# Altium PCB Testboard V3.PcbDoc
Units mil, origin at the board's own origin, x right, y up, seen from the top; angles counter-clockwise.
Board outline 6000 x 4000 mil, 2 copper layers (Top Layer, Bottom Layer); 5 components, 44 nets, 132 pads, 0 vias.
Unrouted connection lines stored in the file: 61.
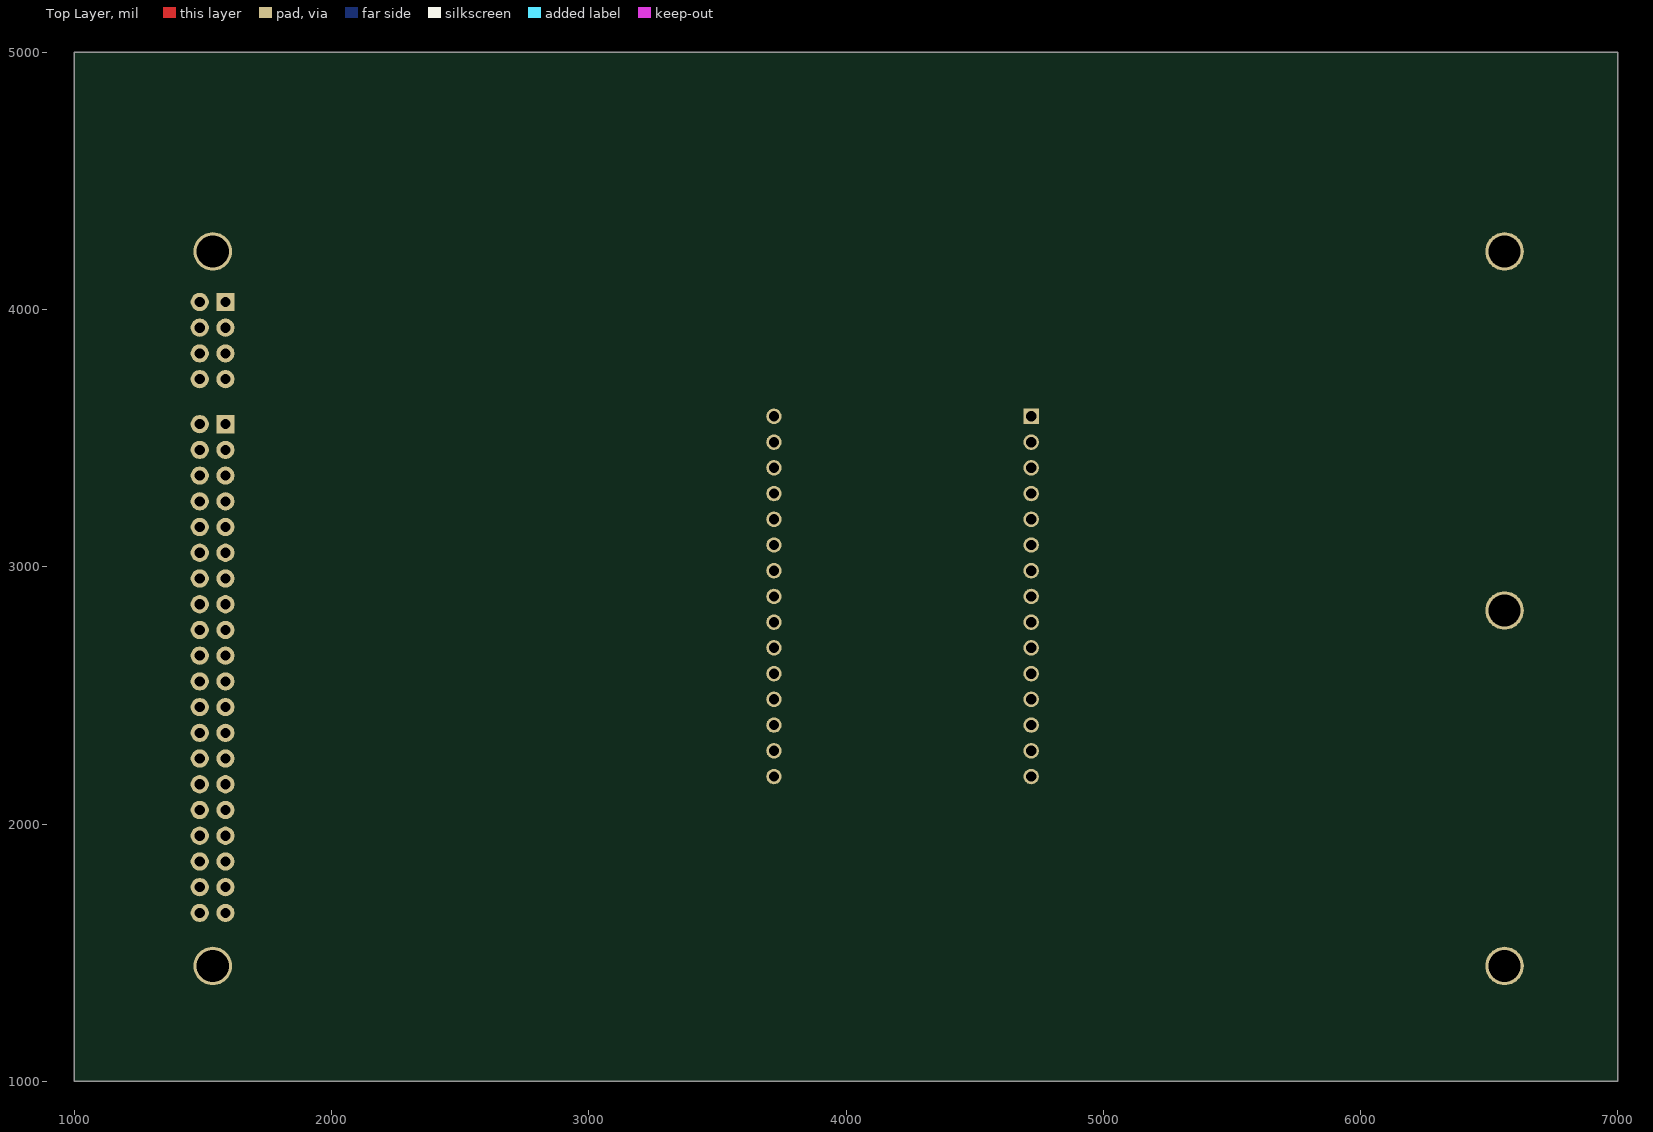
[diagram p0: Top Layer view]
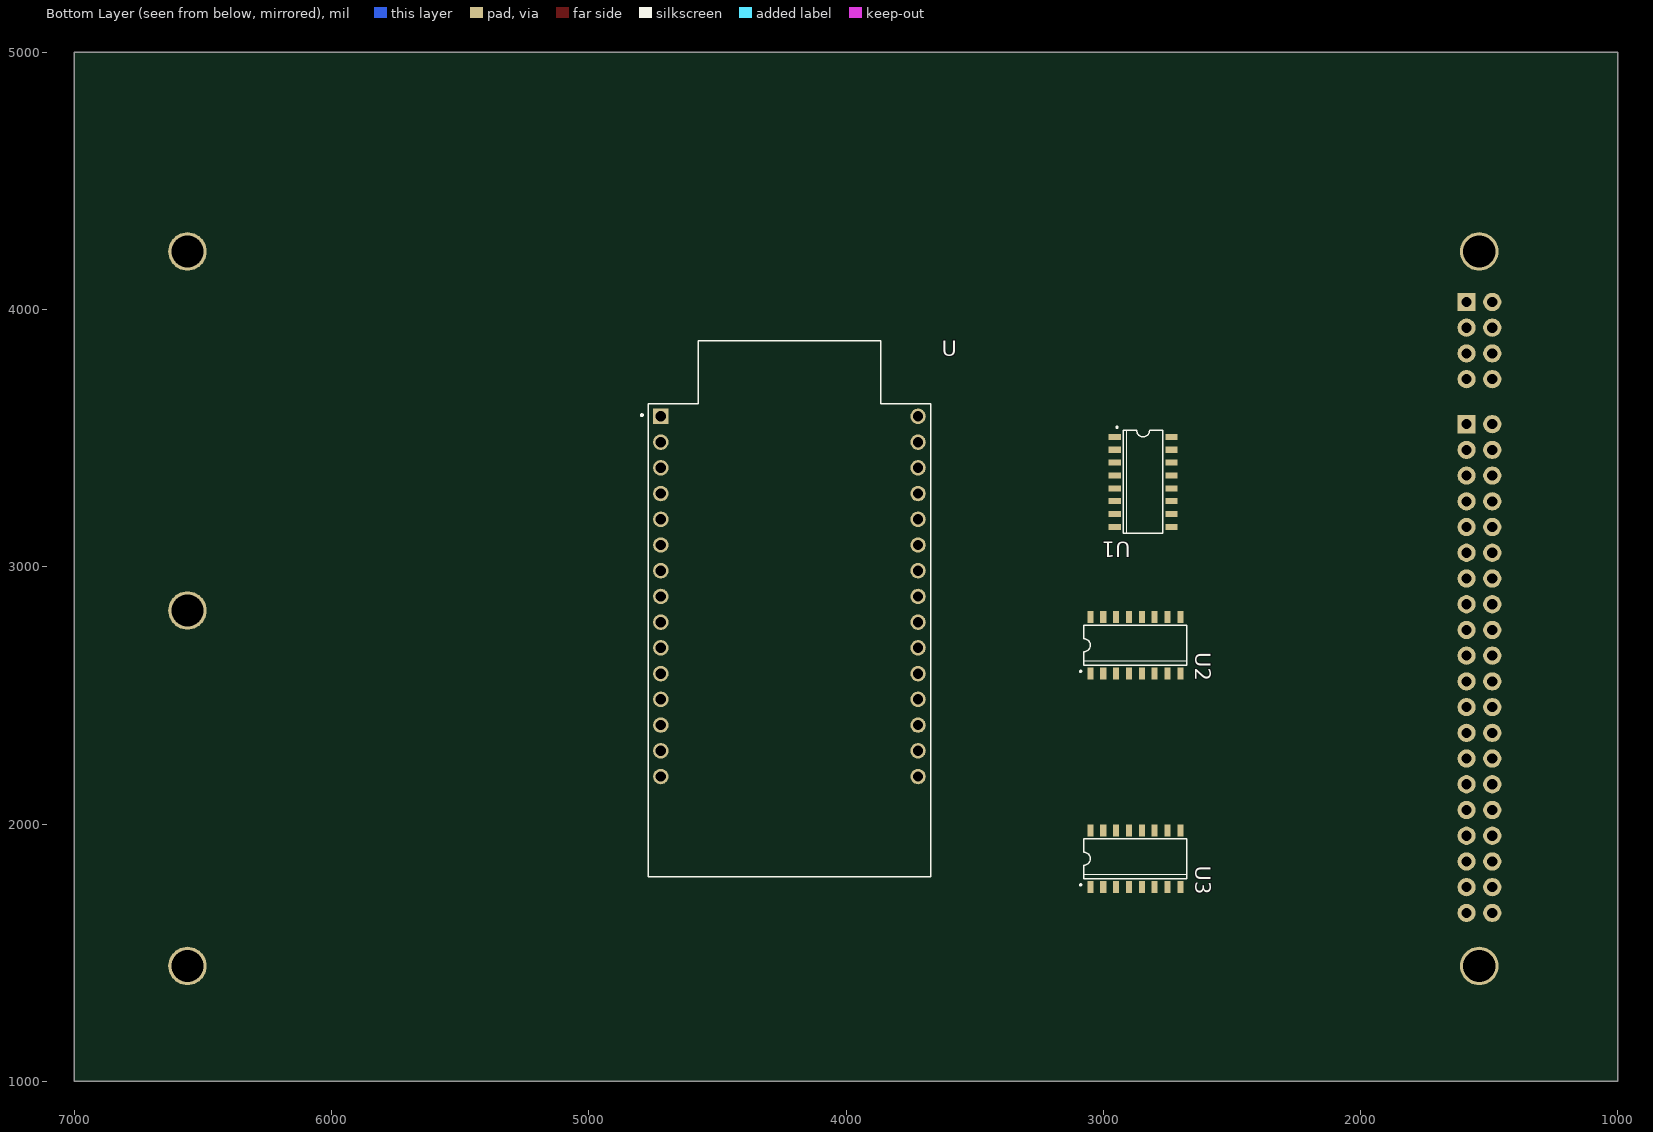
[diagram p1: Bottom Layer view, seen from below]

## Layer stack, top to bottom
Top Solder: solder mask 0.4, Solder Resist, Dk 3.5
Top Layer: signal copper 1.4
Dielectric 1: dielectric 12.6, FR-4, Dk 4.8
Bottom Layer: signal copper 1.4
Bottom Solder: solder mask 0.4, Solder Resist, Dk 3.5

## Board outline
1000,1000 7000,1000 7000,5000 1000,5000

## Design rules (kind name [scope] priority, off if disabled: settings)
Clearance [All] p1: gap=20 ignorepadtopadclearanceinfootprint=FALSE
PolygonConnect [All] p1: connectstyle=Relief reliefconductorwidth=10 reliefentries=4 polygonreliefangle="90 Angle" airgapwidth=10
RoutingVias [All] p1: holewidth=47.24 width=70.87 viastyle="Through Hole" minholewidth=47.24 minwidth=70.87 maxholewidth=47.24 maxwidth=70.87
SolderMaskExpansion [All] p1: expansion=4 istentingtop=FALSE
Width [All] p1: maxlimit=30 minlimit=15 preferedwidth=20
30 further rules are at their usual default settings.

## Components (designator, comment, footprint, x,y, rotation, side; value= is the part's Value field where it differs from the comment)
U "ESP32-DEVKITC" MODULE_ESP32-DEVKITC 4220,2685 r180 bottom
U1 "LOGIC-74HC595N(DIP16)" SO16 2845,3330 r270 bottom
U2 "LOGIC-74HC595N(DIP16)" SO16 2875,2695 r180 bottom
U3 "LOGIC-74HC595N(DIP16)" SO16 2875,1865 r180 bottom
? "TFT" "Female Header 20x2" 1587.56,3554.41 r180 top

## Footprints (in the part's own frame and the unit in brackets; to place one, negate y for a bottom-side part, rotate by r counter-clockwise, add the part's x,y. Pads: shape width x height; smd on the part's side, far side on the other; paste and mask are expansions set on the pad)
"Female Header 20x2" [mm]
  rect 1.8x1.8 hole 1: 1(0,0) 1-1(0,-12.065)
  round 1.8 hole 1: 1-2(2.54,-12.065) 1-3(0,-9.525) 1-4(2.54,-9.525) 1-5(0,-6.985) 1-6(2.54,-6.985) 1-7(0,-4.445) 1-8(2.54,-4.445) 2(2.54,0) 2(2.54,0) 3(0,2.54) 4(2.54,2.54) 5(0,5.08) 6(2.54,5.08) 7(0,7.62) 8(2.54,7.62) 9(0,10.16) 10(2.54,10.16) 11(0,12.7) 12(2.54,12.7) 13(0,15.24) 14(2.54,15.24) 15(0,17.78) 16(2.54,17.78) 17(0,20.32) 18(2.54,20.32) 19(0,22.86) 20(2.54,22.86) 21(0,25.4) 22(2.54,25.4) 23(0,27.94) 24(2.54,27.94) 25(0,30.48) 26(2.54,30.48) 27(0,33.02) 28(2.54,33.02) 29(0,35.56) 30(2.54,35.56) 31(0,38.1) 32(2.54,38.1) 33(0,40.64) 34(2.54,40.64) 35(0,43.18) 36(2.54,43.18) 37(0,45.72) 38(2.54,45.72) 39(0,48.26) 40(2.54,48.26)
  round 3.8 hole 3.2: ""(-126.3,-17.05) ""(-126.3,18.4) ""(-126.3,53.5) ""(1.25,53.5) ""(1.25,-17.05)
  body extent -128.89,-19.67 3.81,56.13, height 15.26
MODULE_ESP32-DEVKITC [mm]
  rect 1.53x1.53 hole 1.02: 1(-12.7,22.85)
  round 1.53 hole 1.02: 2(-12.7,20.31) 3(-12.7,17.77) 4(-12.7,15.23) 5(-12.7,12.69) 6(-12.7,10.15) 7(-12.7,7.61) 8(-12.7,5.07) 9(-12.7,2.53) 10(-12.7,-0.01) 11(-12.7,-2.55) 12(-12.7,-5.09) 13(-12.7,-7.63) 14(-12.7,-10.17) 15(-12.7,-12.71) 16(12.7,-12.71) 17(12.7,-10.17) 18(12.7,-7.63) 19(12.7,-5.09) 20(12.7,-2.55) 21(12.7,-0.01) 22(12.7,2.53) 23(12.7,5.07) 24(12.7,7.61) 25(12.7,10.15) 26(12.7,12.69) 27(12.7,15.23) 28(12.7,17.77) 29(12.7,20.31) 30(12.7,22.85)
  silkscreen extent -14.67,-22.61 13.95,30.3, body extent -14.22,-22.61 14.28,28.32, height 13.03
SO16 [mm]
  rect 0.6x1.2 smd: 1(-4.445,-2.8) 2(-3.175,-2.8) 3(-1.905,-2.8) 4(-0.635,-2.8) 5(0.635,-2.8) 6(1.905,-2.8) 7(3.175,-2.8) 8(4.445,-2.8) 9(4.445,2.8) 10(3.175,2.8) 11(1.905,2.8) 12(0.635,2.8) 13(-0.635,2.8) 14(-1.905,2.8) 15(-3.175,2.8) 16(-4.445,2.8)
  silkscreen extent -5.44,-2.61 5.08,1.96, body extent -4.95,-2.92 4.95,3.08, height 1.75

## Part data
U: "- Transceiver; 802.11 b/g/n _Wi-Fi, WiFi, WLAN_, BluetoothÂ® Smart Ready 4.x Dual Mode For Use With ESP-WROOM-32", Package=None, Availability=Unavailable, MF="Espressif Systems", MP=ESP32-DEVKITC-32D-F, Price=None, SnapEDA_Link=https://www.snapeda.com/parts/ESP32-DEVKITC-32D-F/Espressif%20Systems/view-part/4220172/?ref=snap
U1 U2 U3: "Shift Shift Register 1 Element 8 Bit 16-PDIP", Package="SOT38-4-16 Nexperia", Availability="In Stock", Check_prices=https://www.snapeda.com/parts/74HC595N/Texas+Instruments/view-part/?ref=eda, MF="Texas Instruments", MP=74HC595N, Price=None, Purchase-URL=https://pricing.snapeda.com/search/part/74HC595N/?ref=eda, SnapEDA_Link=https://www.snapeda.com/parts/74HC595N/Texas+Instruments/view-part/?ref=snap

## Nets (pads, with @x,y where several pads share a name; then routed paths per layer and width w, separated by ;. In a path a pad name is that pad's centre, name@x,y a point inside that pad or via, vN(x,y) a via of type N, cw(c..) or ccw(c..) an arc to the next point about the centre after c; other vN are vias at no path point)
+5: ?.2 U1.10 U1.16 U2.10 U2.16 U3.10 U3.16 U.15
GND: ?.1 ?.40 U1.8 U1.13 U2.8 U2.13 U3.8 U3.13 U.14
LATCH: U1.12 U2.12 U3.12 U.25
LCD_BL: ?.39 U.18
LCD_BUSY: ?.37 U.19
LCD_CLK/SCL: ?.34 U.29
LCD_CS: ?.3 U.11
LCD_DC: ?.4 U.9
LCD_DIN/SDA: ?.35 U.26
LCD_DOUT: ?.36 U.22
LCD_PEN: ?.38 U.21
LCD_RD: ?.5 U.12
LCD_RESET: ?.7 U.13
LCD_RPTCS: ?.33 U.20
LCD_TE: ?.8 U.7
LCD_WR: ?.6 U.8
Net_9: ?.9 U1.15
Net_10: ?.10 U1.1
Net_11: ?.11 U1.2
Net_12: ?.12 U1.3
Net_13: ?.13 U1.4
Net_14: ?.14 U1.5
Net_15: ?.15 U1.6
Net_16: ?.16 U1.7
Net_17: ?.17 U2.15
Net_18: ?.18 U2.1
Net_19: ?.19 U2.2
Net_20: ?.20 U2.3
Net_21: ?.21 U2.4
Net_22: ?.22 U2.5
Net_23: ?.23 U2.6
Net_24: ?.24 U2.7
Net_25: ?.25 U3.15
Net_26: ?.26 U3.1
Net_27: ?.27 U3.2
Net_28: ?.28 U3.3
Net_29: ?.29 U3.4
Net_30: ?.30 U3.5
Net_31: ?.31 U3.6
Net_32: ?.32 U3.7
NetU1_9: U1.9 U2.14
NetU2_9: U2.9 U3.14
SPI_MOSI: U1.14 U.30
SPI_SCLK: U1.11 U2.11 U3.11 U.24
pads on no net: ?. ?.1-1 ?.1-2 ?.1-3 ?.1-4 ?.1-5 ?.1-6 ?.1-7 ?.1-8 U3.9 U.1 U.2 U.3 U.4 U.5 U.6 U.10 U.16 U.17 U.23 U.27 U.28